# EAGLE board _X4 (EAGLE 6.2), part 1 of 2
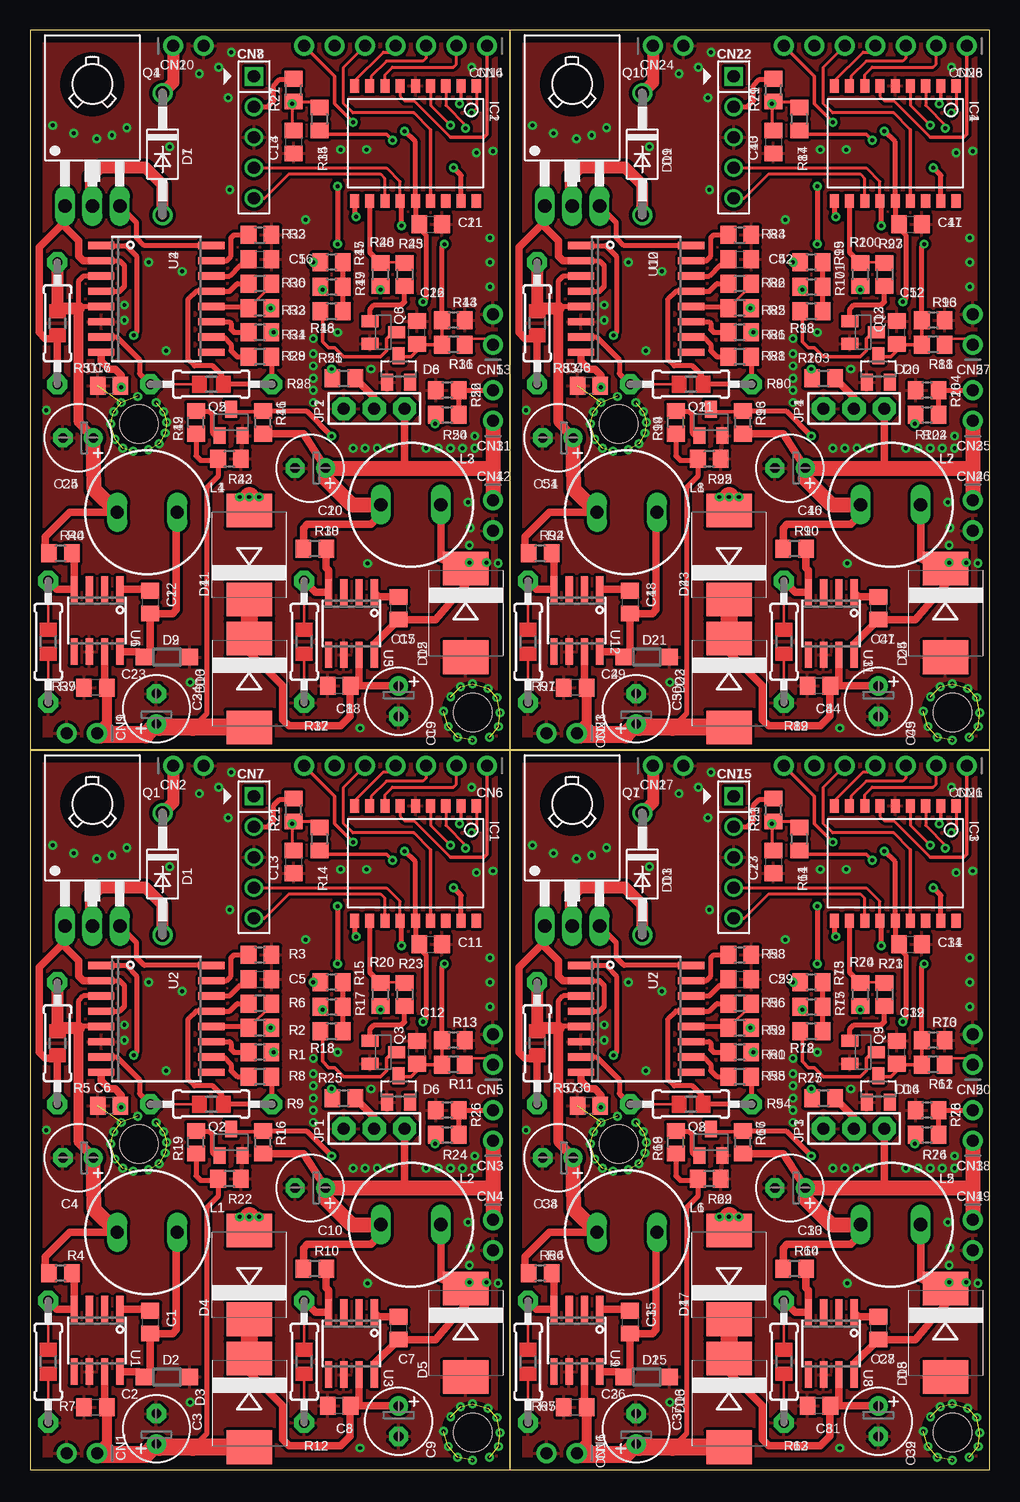
[diagram p0: board, top side]
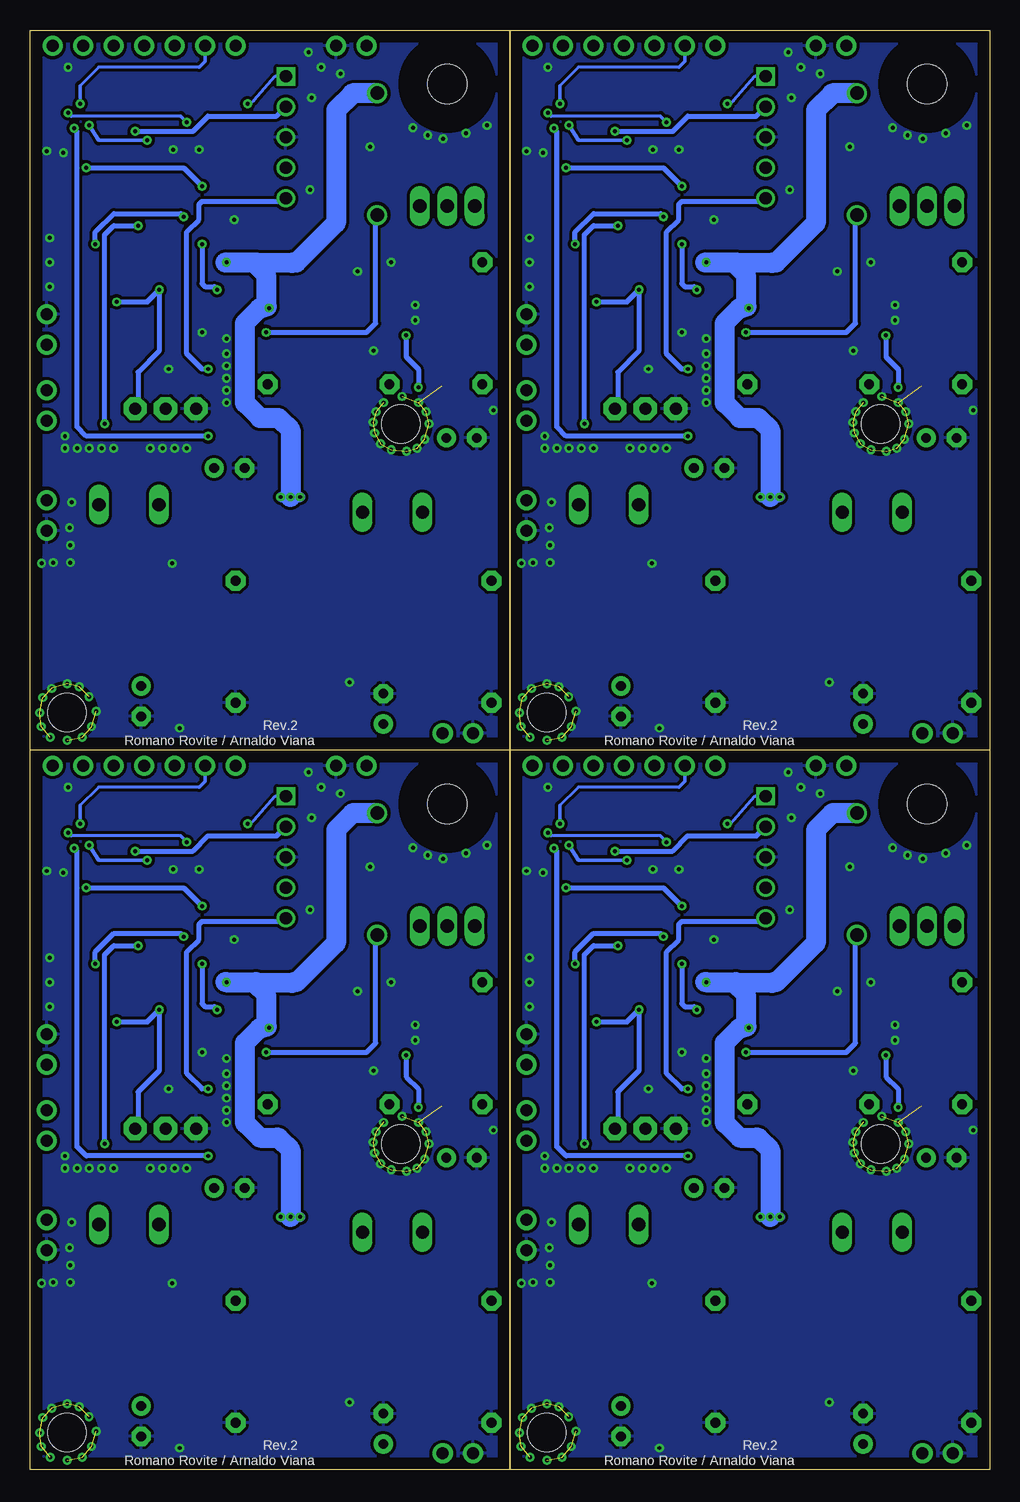
[diagram p1: board, bottom side, seen from below]

Size 80 x 119.99 mm. Coordinates in mm from the lower left corner, seen from the top.
Outline: 40,0 0,0 0,60 40,60
Outline: 40,0 40,60
Outline: 40,59.99 0,59.99 0,119.99 40,119.99
Outline: 40,59.99 40,119.99
Outline: 40,0 80,0 80,60 40,60
Outline: 40,60 40,0
Outline: 40,59.99 80,59.99 80,119.99 40,119.99
Outline: 40,119.99 40,59.99
Copper layers (1*16): Top 0.035mm / dielectric 1.5mm / Bottom 0.035mm
Design rules: minimum track width 10mil, minimum drill 24mil, track to track 8mil, track to pad 8mil, pad to pad 8mil, via to via 8mil, smd to smd 8mil, copper to edge 40mil, drill to drill 8mil, minimum pad ring 10mil, minimum via ring 8mil, stop-mask expansion 4mil, vias tented up to drill 0mil, thermal gap 10mil
Net classes: 1 power: width 0.4 mm, drill 0.6 mm, clearance 0.2 mm
Holes 3.2 mm at 36.93,3.12 9.07,27.15 36.93,63.12 9.07,87.15 76.93,3.12 49.07,27.15 76.93,63.12 49.07,87.15

## Footprints (pad centres in the part's own frame; a part is rotated, then mirrored left to right if it is on the bottom)
C0805 = smd 1.3 x 1.5: 1 -0.95,0; 2 0.95,0
E2,5-6 = drill 0.813 pad 1.6: + -1.27,0 | drill 0.813 pad 1.6 octagon: - 1.27,0
1X02_ROUND = drill 1 pad 1.676: 1 -1.27,0; 2 1.27,0
1X07_ROUND = drill 1 pad 1.676: 1 -7.62,0; 2 -5.08,0; 3 -2.54,0; 4 0,0; 5 2.54,0; 6 5.08,0; 7 7.62,0
HEADER_PRG_1X05 = drill 1.016 square: 1 -5.08,0 | drill 1.016: 2 -2.54,0; 3 0,0; 4 2.54,0; 5 5.08,0
DO41-10 = drill 1.118: A 5.08,0; C -5.08,0
SOD123 = smd 1.4 x 1.4: A 1.9,0; C -1.9,0
SMC = smd 2.8 x 3.8: A 3.7,0; C -3.7,0
SOT23 = smd 1 x 1.4: 1 -0.95,-1.1; 2 0.95,-1.1; 3 0,1.1
SO-18W = smd 0.762 x 1.143: 1 -5.08,-4.788; 2 -3.81,-4.788; 3 -2.54,-4.788; 4 -1.27,-4.788; 5 0,-4.788; 6 1.27,-4.788; 7 2.54,-4.788; 8 3.81,-4.788; 9 5.08,-4.788; 10 5.08,4.788; 11 3.81,4.788; 12 2.54,4.788; 13 1.27,4.788; 14 0,4.788; 15 -1.27,4.788; 16 -2.54,4.788; 17 -3.81,4.788; 18 -5.08,4.788
JUMPER3 = drill 1 pad 1.93 octagon: 1 -2.54,0; 2 0,0; 3 2.54,0
SD12K100 = drill 1.1 long: 1 -2.5,0; 2 2.5,0
TO126 = drill 1.118 long: 1 -2.286,-5.08; 2 0,-5.08; 3 2.286,-5.08 | hole 3.302: 0,5.08
SOT23-BEC = smd 1 x 1.4: B -0.95,-1.1; C 0,1.1; E 0.95,-1.1
R0805 = smd 1.3 x 1.5: 1 -0.95,0; 2 0.95,0
0805-THM = drill 0.813 pad 1.676 octagon: 1 -5.08,0; 2 5.08,0
SOIC8_150MIL = smd 0.6 x 2.2: 1 -1.905,-2.6; 2 -0.635,-2.6; 3 0.635,-2.6; 4 1.905,-2.6; 5 1.905,2.6; 6 0.635,2.6; 7 -0.635,2.6; 8 -1.905,2.6
SOIC_16 = smd 0.6 x 2.2: 1 -4.445,-4.6; 2 -3.175,-4.6; 3 -1.905,-4.6; 4 -0.635,-4.6; 5 0.635,-4.6; 6 1.905,-4.6; 7 3.175,-4.6; 8 4.445,-4.6; 9 4.445,4.6; 10 3.175,4.6; 11 1.905,4.6; 12 0.635,4.6; 13 -0.635,4.6; 14 -1.905,4.6; 15 -3.175,4.6; 16 -4.445,4.6

## Placement (x,y rotation side)
C1  10n  [C0805]  10.03,12.32 270 top
C2  100n  [C0805]  5.46,5.21 180 top
C3  4,7uF  [E2,5-6]  10.54,3.43 90 top
C4  47uF  [E2,5-6]  4.01,26.01 180 top
C5  100n  [C0805]  19.18,40.89 0 top
C6  100n  [C0805]  6.6,30.35 180 top
C7  10n  [C0805]  30.73,11.81 270 top
C8  100n  [C0805]  25.78,5.33 180 top
C9  4u7F  [E2,5-6]  30.73,4.06 270 top
C10  220uF  [E2,5-6]  23.37,23.5 180 top
C11  100n  [C0805]  33.4,43.81 0 top
C12  100n  [C0805]  32.26,34.8 90 top
C13  100n  [C0805]  21.97,50.67 270 top
C14  100n  [C0805]  21.97,110.67 270 top
C15  10n  [C0805]  30.73,71.81 270 top
C16  100n  [C0805]  19.18,100.89 0 top
C17  100n  [C0805]  6.6,90.35 180 top
C18  100n  [C0805]  25.78,65.33 180 top
C19  4u7F  [E2,5-6]  30.73,64.06 270 top
C20  220uF  [E2,5-6]  23.37,83.49 180 top
C21  100n  [C0805]  33.4,103.81 0 top
C22  10n  [C0805]  10.03,72.31 270 top
C23  100n  [C0805]  5.46,65.2 180 top
C24  4,7uF  [E2,5-6]  10.54,63.42 90 top
C25  47uF  [E2,5-6]  4.01,86 180 top
C26  100n  [C0805]  32.26,94.79 90 top
C27  100n  [C0805]  61.97,50.67 270 top
C28  10n  [C0805]  70.73,11.81 270 top
C29  100n  [C0805]  59.18,40.89 0 top
C30  100n  [C0805]  46.6,30.35 180 top
C31  100n  [C0805]  65.78,5.33 180 top
C32  4u7F  [E2,5-6]  70.73,4.06 270 top
C33  220uF  [E2,5-6]  63.37,23.5 180 top
C34  100n  [C0805]  73.4,43.81 0 top
C35  10n  [C0805]  50.03,12.32 270 top
C36  100n  [C0805]  45.46,5.21 180 top
C37  4,7uF  [E2,5-6]  50.54,3.43 90 top
C38  47uF  [E2,5-6]  44.01,26.01 180 top
C39  100n  [C0805]  72.26,34.8 90 top
C40  100n  [C0805]  61.97,110.67 270 top
C41  10n  [C0805]  70.73,71.81 270 top
C42  100n  [C0805]  59.18,100.89 0 top
C43  100n  [C0805]  46.6,90.35 180 top
C44  100n  [C0805]  65.78,65.33 180 top
C45  4u7F  [E2,5-6]  70.73,64.06 270 top
C46  220uF  [E2,5-6]  63.37,83.49 180 top
C47  100n  [C0805]  73.4,103.81 0 top
C48  10n  [C0805]  50.03,72.31 270 top
C49  100n  [C0805]  45.46,65.2 180 top
C50  4,7uF  [E2,5-6]  50.54,63.42 90 top
C51  47uF  [E2,5-6]  44.01,86 180 top
C52  100n  [C0805]  72.26,94.79 90 top
CN1  [1X02_ROUND]  4.32,1.4 180 top
CN2  [1X02_ROUND]  13.21,58.67 0 top
CN3  [1X02_ROUND]  38.61,28.7 90 top
CN4  [1X02_ROUND]  38.61,19.56 270 top
CN5  [1X02_ROUND]  38.61,35.05 90 top
CN6  [1X07_ROUND]  30.48,58.67 180 top
CN7  CON_HEADER_PRG_PIC_ICSP0.1INCH_A  [HEADER_PRG_1X05]  18.67,51.05 270 top
CN8  CON_HEADER_PRG_PIC_ICSP0.1INCH_A  [HEADER_PRG_1X05]  18.67,111.05 270 top
CN9  [1X02_ROUND]  4.32,61.39 180 top
CN10  [1X02_ROUND]  13.21,118.67 0 top
CN11  [1X02_ROUND]  38.61,88.7 90 top
CN12  [1X02_ROUND]  38.61,79.55 270 top
CN13  [1X02_ROUND]  38.61,95.05 90 top
CN14  [1X07_ROUND]  30.48,118.67 180 top
CN15  CON_HEADER_PRG_PIC_ICSP0.1INCH_A  [HEADER_PRG_1X05]  58.67,51.05 270 top
CN16  [1X02_ROUND]  44.32,1.4 180 top
CN17  [1X02_ROUND]  53.21,58.67 0 top
CN18  [1X02_ROUND]  78.61,28.7 90 top
CN19  [1X02_ROUND]  78.61,19.56 270 top
CN20  [1X02_ROUND]  78.61,35.05 90 top
CN21  [1X07_ROUND]  70.48,58.67 180 top
CN22  CON_HEADER_PRG_PIC_ICSP0.1INCH_A  [HEADER_PRG_1X05]  58.67,111.05 270 top
CN23  [1X02_ROUND]  44.32,61.39 180 top
CN24  [1X02_ROUND]  53.21,118.67 0 top
CN25  [1X02_ROUND]  78.61,88.7 90 top
CN26  [1X02_ROUND]  78.61,79.55 270 top
CN27  [1X02_ROUND]  78.61,95.05 90 top
CN28  [1X07_ROUND]  70.48,118.67 180 top
D1  1N4004  [DO41-10]  11.05,49.66 270 top
D2  [SOD123]  11.43,7.75 0 top
D3  SS34  [SMC]  18.29,5.59 270 top
D4  SS34  [SMC]  18.29,16.26 90 top
D5  SS34  [SMC]  36.32,11.43 270 top
D6  4v3  [SOT23]  30.73,31.75 0 top
D7  1N4004  [DO41-10]  11.05,109.65 270 top
D8  4v3  [SOT23]  30.73,91.74 0 top
D9  [SOD123]  11.43,67.74 0 top
D10  SS34  [SMC]  18.29,65.58 270 top
D11  SS34  [SMC]  18.29,76.25 90 top
D12  SS34  [SMC]  36.32,71.42 270 top
D13  1N4004  [DO41-10]  51.05,49.66 270 top
D14  4v3  [SOT23]  70.73,31.75 0 top
D15  [SOD123]  51.43,7.75 0 top
D16  SS34  [SMC]  58.29,5.59 270 top
D17  SS34  [SMC]  58.29,16.26 90 top
D18  SS34  [SMC]  76.32,11.43 270 top
D19  1N4004  [DO41-10]  51.05,109.65 270 top
D20  4v3  [SOT23]  70.73,91.74 0 top
D21  [SOD123]  51.43,67.74 0 top
D22  SS34  [SMC]  58.29,65.58 270 top
D23  SS34  [SMC]  58.29,76.25 90 top
D24  SS34  [SMC]  76.32,71.42 270 top
IC1  PIC16F627SO  [SO-18W]  32.13,50.55 180 top
IC2  PIC16F627SO  [SO-18W]  32.13,110.54 180 top
IC3  PIC16F627SO  [SO-18W]  72.13,50.55 180 top
IC4  PIC16F627SO  [SO-18W]  72.13,110.54 180 top
JP1  [JUMPER3]  28.7,28.45 0 top
JP2  [JUMPER3]  28.7,88.44 0 top
JP3  [JUMPER3]  68.7,28.45 0 top
JP4  [JUMPER3]  68.7,88.44 0 top
L1  68uH  [SD12K100]  9.78,19.81 0 top
L2  22uH/3A  [SD12K100]  31.75,20.45 0 top
L3  22uH/3A  [SD12K100]  31.75,80.44 0 top
L4  68uH  [SD12K100]  9.78,79.81 0 top
L5  22uH/3A  [SD12K100]  71.75,20.45 0 top
L6  68uH  [SD12K100]  49.78,19.81 0 top
L7  22uH/3A  [SD12K100]  71.75,80.44 0 top
L8  68uH  [SD12K100]  49.78,79.81 0 top
Q1  BD140  [TO126]  5.21,50.42 0 top
Q2  BC817  [SOT23-BEC]  16.76,27.3 0 top
Q3  BC817  [SOT23-BEC]  29.46,34.8 270 top
Q4  BD140  [TO126]  5.21,110.41 0 top
Q5  BC817  [SOT23-BEC]  16.76,87.3 0 top
Q6  BC817  [SOT23-BEC]  29.46,94.79 270 top
Q7  BD140  [TO126]  45.21,50.42 0 top
Q8  BC817  [SOT23-BEC]  56.76,27.3 0 top
Q9  BC817  [SOT23-BEC]  69.46,34.8 270 top
Q10  BD140  [TO126]  45.21,110.41 0 top
Q11  BC817  [SOT23-BEC]  56.76,87.3 0 top
Q12  BC817  [SOT23-BEC]  69.46,94.79 270 top
R1  1k5  [R0805]  19.18,34.8 180 top
R2  66k5  [R0805]  19.18,36.83 180 top
R3  470R  [R0805]  19.18,42.93 0 top
R4  10k  [R0805]  2.54,16.38 180 top
R5  1R/1W  [0805-THM]  2.29,35.56 270 top
R6  15k  [R0805]  19.18,38.86 180 top
R7  1k69  [0805-THM]  1.52,9.02 90 top
R8  470k  [R0805]  19.18,32.77 180 top
R9  43k  [0805-THM]  15.11,30.48 0 top
R10  10k  [R0805]  23.75,16.76 180 top
R11  10k  [R0805]  35.31,33.78 180 top
R12  3k74  [0805-THM]  22.86,9.02 90 top
R13  27k  [R0805]  35.31,35.81 180 top
R14  470R  [R0805]  24.13,52.58 270 top
R15  10k  [R0805]  25.15,40.64 180 top
R16  10k  [R0805]  19.43,27.3 90 top
R17  10k  [R0805]  25.15,38.61 0 top
R18  10k  [R0805]  25.15,36.58 0 top
R19  10k  [R0805]  13.84,27.3 90 top
R20  10k  [R0805]  29.21,39.62 270 top
R21  10k  [R0805]  21.97,54.99 90 top
R22  27k  [R0805]  16.64,24.26 180 top
R23  10k  [R0805]  31.24,39.62 270 top
R24  470R  [R0805]  34.8,27.94 0 top
R25  470R  [R0805]  26.16,30.99 0 top
R26  10k  [R0805]  34.8,29.97 180 top
R27  10k  [R0805]  21.97,114.99 90 top
R28  43k  [0805-THM]  15.11,90.47 0 top
R29  470k  [R0805]  19.18,92.76 180 top
R30  15k  [R0805]  19.18,98.86 180 top
R31  1R/1W  [0805-THM]  2.29,95.55 270 top
R32  470R  [R0805]  19.18,102.92 0 top
R33  66k5  [R0805]  19.18,96.82 180 top
R34  1k5  [R0805]  19.18,94.79 180 top
R35  470R  [R0805]  24.13,112.57 270 top
R36  10k  [R0805]  35.31,93.78 180 top
R37  3k74  [0805-THM]  22.86,69.01 90 top
R38  10k  [R0805]  23.75,76.76 180 top
R39  1k69  [0805-THM]  1.52,69.01 90 top
R40  10k  [R0805]  2.54,76.38 180 top
R41  10k  [R0805]  19.43,87.3 90 top
R42  10k  [R0805]  13.84,87.3 90 top
R43  27k  [R0805]  16.64,84.25 180 top
R44  27k  [R0805]  35.31,95.81 180 top
R45  10k  [R0805]  31.24,99.62 270 top
R46  10k  [R0805]  25.15,96.57 0 top
R47  10k  [R0805]  25.15,100.63 180 top
R48  10k  [R0805]  29.21,99.62 270 top
R49  10k  [R0805]  25.15,98.6 0 top
R50  470R  [R0805]  34.8,87.93 0 top
R51  470R  [R0805]  26.16,90.98 0 top
R52  10k  [R0805]  34.8,89.97 180 top
R53  10k  [R0805]  61.97,54.99 90 top
R54  43k  [0805-THM]  55.11,30.48 0 top
R55  470k  [R0805]  59.18,32.77 180 top
R56  15k  [R0805]  59.18,38.86 180 top
R57  1R/1W  [0805-THM]  42.29,35.56 270 top
R58  470R  [R0805]  59.18,42.93 0 top
R59  66k5  [R0805]  59.18,36.83 180 top
R60  1k5  [R0805]  59.18,34.8 180 top
R61  470R  [R0805]  64.13,52.58 270 top
R62  10k  [R0805]  75.31,33.78 180 top
R63  3k74  [0805-THM]  62.86,9.02 90 top
R64  10k  [R0805]  63.75,16.76 180 top
R65  1k69  [0805-THM]  41.52,9.02 90 top
R66  10k  [R0805]  42.54,16.38 180 top
R67  10k  [R0805]  59.43,27.3 90 top
R68  10k  [R0805]  53.84,27.3 90 top
R69  27k  [R0805]  56.64,24.26 180 top
R70  27k  [R0805]  75.31,35.81 180 top
R71  10k  [R0805]  71.24,39.62 270 top
R72  10k  [R0805]  65.15,36.58 0 top
R73  10k  [R0805]  65.15,40.64 180 top
R74  10k  [R0805]  69.21,39.62 270 top
R75  10k  [R0805]  65.15,38.61 0 top
R76  470R  [R0805]  74.8,27.94 0 top
R77  470R  [R0805]  66.16,30.99 0 top
R78  10k  [R0805]  74.8,29.97 180 top
R79  10k  [R0805]  61.97,114.99 90 top
R80  43k  [0805-THM]  55.11,90.47 0 top
R81  470k  [R0805]  59.18,92.76 180 top
R82  15k  [R0805]  59.18,98.86 180 top
R83  1R/1W  [0805-THM]  42.29,95.55 270 top
R84  470R  [R0805]  59.18,102.92 0 top
R85  66k5  [R0805]  59.18,96.82 180 top
R86  1k5  [R0805]  59.18,94.79 180 top
R87  470R  [R0805]  64.13,112.57 270 top
R88  10k  [R0805]  75.31,93.78 180 top
R89  3k74  [0805-THM]  62.86,69.01 90 top
R90  10k  [R0805]  63.75,76.76 180 top
R91  1k69  [0805-THM]  41.52,69.01 90 top
R92  10k  [R0805]  42.54,76.38 180 top
R93  10k  [R0805]  59.43,87.3 90 top
R94  10k  [R0805]  53.84,87.3 90 top
R95  27k  [R0805]  56.64,84.25 180 top
R96  27k  [R0805]  75.31,95.81 180 top
R97  10k  [R0805]  71.24,99.62 270 top
R98  10k  [R0805]  65.15,96.57 0 top
R99  10k  [R0805]  65.15,100.63 180 top
R100  10k  [R0805]  69.21,99.62 270 top
R101  10k  [R0805]  65.15,98.6 0 top
R102  470R  [R0805]  74.8,87.93 0 top
R103  470R  [R0805]  66.16,90.98 0 top
R104  10k  [R0805]  74.8,89.97 180 top
U1  TPS5420  [SOIC8_150MIL]  5.59,10.79 180 top
U2  UC2906  [SOIC_16]  10.54,37.59 270 top
U3  TPS5420  [SOIC8_150MIL]  26.8,10.54 180 top
U4  UC2906  [SOIC_16]  10.54,97.59 270 top
U5  TPS5420  [SOIC8_150MIL]  26.8,70.54 180 top
U6  TPS5420  [SOIC8_150MIL]  5.59,70.79 180 top
U7  UC2906  [SOIC_16]  50.54,37.59 270 top
U8  TPS5420  [SOIC8_150MIL]  66.8,10.54 180 top
U9  TPS5420  [SOIC8_150MIL]  45.59,10.79 180 top
U10  UC2906  [SOIC_16]  50.54,97.59 270 top
U11  TPS5420  [SOIC8_150MIL]  66.8,70.54 180 top
U12  TPS5420  [SOIC8_150MIL]  45.59,70.79 180 top

## Library data of the parts
C1-C52 R1-R4 R6 R8 R10 R11 R13-R27 R29 R30 R32-R36 R38 R40-R53 R55 R56 R58-R62 R64 R66-R79 R81 R82 R84-R88 R90 R92-R104 = rcl
CN1-CN6 CN9-CN14 CN16-CN21 CN23-CN28 JP1-JP4 R5 R7 R9 R12 R28 R31 R37 R39 R54 R57 R63 R65 R80 R83 R89 R91 U1-U12 = junior
CN7 CN8 CN15 CN22 = dp_devices
D1-D24 = diode
IC1-IC4 = microchip; MF: MICROCHIP; MPN: PIC16F627-04/SO; OC_FARNELL: 1084265; OC_NEWARK: 69K7632
L1-L8 = inductor-neosid; OC_FARNELL: unknown; OC_NEWARK: unknown
Q1 Q4 Q7 Q10 = transistor-pnp
Q2 Q3 Q5 Q6 Q8 Q9 Q11 Q12 = transistor

## Nets
12V: C4.+ L1.1 R4.2 R5.1 U2.3 U2.5
12V1: C25.+ L4.1 R31.1 R40.2 U4.3 U4.5
12V2: C38.+ L6.1 R57.1 R66.2 U7.3 U7.5
12V3: C51.+ L8.1 R83.1 R92.2 U10.3 U10.5
+5V [power]: C10.+ C11.1 CN3.1 CN4.1 CN7.2 IC1.14 JP1.3 L2.1 R10.2 R16.1 R20.2 R21.2
+5V1 [power]: C20.+ C21.1 CN8.2 CN11.1 CN12.1 IC2.14 JP2.3 L3.1 R27.2 R38.2 R41.1 R48.2
+5V2 [power]: C33.+ C34.1 CN15.2 CN18.1 CN19.1 IC3.14 JP3.3 L5.1 R53.2 R64.2 R67.1 R74.2
+5V3 [power]: C46.+ C47.1 CN22.2 CN25.1 CN26.1 IC4.14 JP4.3 L7.1 R79.2 R90.2 R93.1 R100.2
DI0: CN6.7 IC1.1
DI1: CN6.6 IC1.2
DI2: CN14.7 IC2.1
DI3: CN14.6 IC2.2
DI4: CN21.7 IC3.1
DI5: CN21.6 IC3.2
DI6: CN28.7 IC4.1
DI7: CN28.6 IC4.2
DO0: CN6.1 IC1.6
DO1: CN6.2 IC1.7
DO2: CN6.3 IC1.8
DO3: CN6.4 IC1.9
DO4: CN6.5 IC1.15
DO5: CN14.4 IC2.9
DO6: CN14.5 IC2.15
DO7: CN14.1 IC2.6
DO8: CN14.2 IC2.7
DO9: CN14.3 IC2.8
DO10: CN21.4 IC3.9
DO11: CN21.5 IC3.15
DO12: CN21.1 IC3.6
DO13: CN21.2 IC3.7
DO14: CN21.3 IC3.8
DO15: CN28.4 IC4.9
DO16: CN28.5 IC4.15
DO17: CN28.1 IC4.6
DO18: CN28.2 IC4.7
DO19: CN28.3 IC4.8
ESTADO_ALIM: IC1.3 Q2.C R16.2
ESTADO_ALIM1: IC2.3 Q5.C R41.2
ESTADO_ALIM2: IC3.3 Q8.C R67.2
ESTADO_ALIM3: IC4.3 Q11.C R93.2
GND [power]: C2.2 C3.- C4.- C5.2 C6.2 C8.2 C9.- C10.- C11.2 C12.2 C13.2 CN1.2 CN2.2 CN4.2 CN5.2 CN7.3 D2.A D5.A D6.1 IC1.5 JP1.1 Q2.E Q3.E R3.2 R7.1 R12.1 R13.1 R22.1 R26.2 U1.6 U2.6 U3.6
GND1 [power]: C14.2 C16.2 C17.2 C18.2 C19.- C20.- C21.2 C23.2 C24.- C25.- C26.2 CN8.3 CN9.2 CN10.2 CN12.2 CN13.2 D8.1 D9.A D12.A IC2.5 JP2.1 Q5.E Q6.E R32.2 R37.1 R39.1 R43.1 R44.1 R52.2 U4.6 U5.6 U6.6
GND2 [power]: C27.2 C29.2 C30.2 C31.2 C32.- C33.- C34.2 C36.2 C37.- C38.- C39.2 CN15.3 CN16.2 CN17.2 CN19.2 CN20.2 D14.1 D15.A D18.A IC3.5 JP3.1 Q8.E Q9.E R58.2 R63.1 R65.1 R69.1 R70.1 R78.2 U7.6 U8.6 U9.6
GND3 [power]: C40.2 C42.2 C43.2 C44.2 C45.- C46.- C47.2 C49.2 C50.- C51.- C52.2 CN22.3 CN23.2 CN24.2 CN26.2 CN27.2 D20.1 D21.A D24.A IC4.5 JP4.1 Q11.E Q12.E R84.2 R89.1 R91.1 R95.1 R96.1 R104.2 U10.6 U11.6 U12.6
MCLR: C13.1 CN7.1 R14.1 R21.1
MCLR1: C14.1 CN8.1 R27.1 R35.1
MCLR2: C27.1 CN15.1 R53.1 R61.1
MCLR3: C40.1 CN22.1 R79.1 R87.1
N$1: C6.1 U2.1 U2.8
N$2: IC1.4 R14.2
N$3: CN3.2 R24.2 R26.1
N$4: C5.1 U2.14
N$5: R9.1 U2.7
N$6: R3.1 U2.15
N$7: C7.1 U3.1
N$8: R2.2 R6.1 U2.12
N$9: R1.2 U2.11
N$10: Q1.3 U2.16
N$11: D1.A Q1.2 R1.1
N$12: R6.2 R8.1 R9.2 U2.13
N$13: R8.2 U2.10
N$14: C1.1 U1.1
N$15: Q3.B R23.2
N$16: Q3.C R18.1
N$17: Q1.1 R5.2 U2.2 U2.4
N$18: R10.1 R12.2 U3.4
N$19: C7.2 D5.C L2.2 U3.8
N$20: R4.1 R7.2 U1.4
N$21: JP1.2 R25.2
N$22: C8.1 C9.+ D3.C D4.C U3.7
N$23: C1.2 D2.C L1.2 U1.8
N$24: R15.1 R17.2 R18.2
N$25: C12.1 D6.3 IC1.10 R11.2 R13.2
N$26: Q4.3 U4.16
N$27: D7.A Q4.2 R34.1
N$28: R28.2 R29.1 R30.2 U4.13
N$29: R29.2 U4.10
N$30: Q2.B R19.2
N$31: R28.1 U4.7
N$32: R32.1 U4.15
N$33: R30.1 R33.2 U4.12
N$34: R34.2 U4.11
N$35: IC2.4 R35.2
N$36: C26.1 D8.3 IC2.10 R36.2 R44.2
N$37: Q6.B R45.2
N$38: Q6.C R46.1
N$39: C16.1 U4.14
N$40: C17.1 U4.1 U4.8
N$41: Q4.1 R31.2 U4.2 U4.4
N$42: C15.1 U5.1
N$43: R37.2 R38.1 U5.4
N$44: C15.2 D12.C L3.2 U5.8
N$45: C18.1 C19.+ D10.C D11.C U5.7
N$46: C22.1 U6.1
N$47: R39.2 R40.1 U6.4
N$48: C22.2 D9.C L4.2 U6.8
N$49: Q5.B R42.2
N$50: R46.2 R47.1 R49.2
N$51: CN11.2 R50.2 R52.1
N$52: JP2.2 R51.2
N$53: Q7.3 U7.16
N$54: D13.A Q7.2 R60.1
N$55: R54.2 R55.1 R56.2 U7.13
N$56: R55.2 U7.10
N$57: R54.1 U7.7
N$58: R58.1 U7.15
N$59: R56.1 R59.2 U7.12
N$60: R60.2 U7.11
N$61: IC3.4 R61.2
N$62: C39.1 D14.3 IC3.10 R62.2 R70.2
N$63: Q9.B R71.2
N$64: Q9.C R72.1
N$65: C29.1 U7.14
N$66: C30.1 U7.1 U7.8
N$67: Q7.1 R57.2 U7.2 U7.4
N$68: C28.1 U8.1
N$69: R63.2 R64.1 U8.4
N$70: C28.2 D18.C L5.2 U8.8
N$71: C31.1 C32.+ D16.C D17.C U8.7
N$72: C35.1 U9.1
N$73: R65.2 R66.1 U9.4
N$74: C35.2 D15.C L6.2 U9.8
N$75: Q8.B R68.2
N$76: R72.2 R73.1 R75.2
N$77: CN18.2 R76.2 R78.1
N$78: JP3.2 R77.2
N$79: Q10.3 U10.16
N$80: D19.A Q10.2 R86.1
N$81: R80.2 R81.1 R82.2 U10.13
N$82: R81.2 U10.10
N$83: R80.1 U10.7
N$84: R84.1 U10.15
N$85: R82.1 R85.2 U10.12
N$86: R86.2 U10.11
N$87: IC4.4 R87.2
N$88: C52.1 D20.3 IC4.10 R88.2 R96.2
N$89: Q12.B R97.2
N$90: Q12.C R98.1
N$91: C42.1 U10.14
N$92: C43.1 U10.1 U10.8
N$93: Q10.1 R83.2 U10.2 U10.4
N$94: C41.1 U11.1
N$95: R89.2 R90.1 U11.4
N$96: C41.2 D24.C L7.2 U11.8
N$97: C44.1 C45.+ D22.C D23.C U11.7
N$98: C48.1 U12.1
N$99: R91.2 R92.1 U12.4
N$100: C48.2 D21.C L8.2 U12.8
N$101: Q11.B R94.2
N$102: R98.2 R99.1 R101.2
N$103: CN25.2 R102.2 R104.1
N$104: JP4.2 R103.2
POS_CHAVE: CN5.1 R11.1
POS_CHAVE1: CN13.1 R36.1
POS_CHAVE2: CN20.1 R62.1
POS_CHAVE3: CN27.1 R88.1
RA0: IC1.17 R17.1
RA1: IC2.17 R49.1
RA2: IC3.17 R75.1
RA3: IC4.17 R101.1
RB1: IC2.11 R45.1 R48.1
RB2: IC3.11 R71.1 R74.1
RB3: IC4.11 R97.1 R100.1
RB5: IC1.11 R20.1 R23.1
RB6/CLK: CN7.5 IC1.12 R25.1
RB6/CLK1: CN8.5 IC2.12 R51.1
RB6/CLK2: CN15.5 IC3.12 R77.1
RB6/CLK3: CN22.5 IC4.12 R103.1
RB7/DATA: CN7.4 IC1.13 R24.1
RB7/DATA1: CN8.4 IC2.13 R50.1
RB7/DATA2: CN15.4 IC3.13 R76.1
RB7/DATA3: CN22.4 IC4.13 R102.1
VBAT: CN2.1 D1.C D4.A R2.1 R15.2
VBAT1: CN10.1 D7.C D11.A R33.1 R47.2
VBAT2: CN17.1 D13.C D17.A R59.1 R73.2
VBAT3: CN24.1 D19.C D23.A R85.1 R99.2
VIN: C2.1 C3.+ CN1.1 D3.A R19.1 R22.2 U1.7
VIN1: C23.1 C24.+ CN9.1 D10.A R42.1 R43.2 U6.7
VIN2: C36.1 C37.+ CN16.1 D16.A R68.1 R69.2 U9.7
VIN3: C49.1 C50.+ CN23.1 D22.A R94.1 R95.2 U12.7